# Altium PCB koosh_sensor_top_v1_1.PcbDoc
Units mil, origin at the board's own origin, x right, y up, seen from the top; angles counter-clockwise.
Board outline 600 x 600 mil, 4 copper layers (Top Layer, PWR, GND, Bottom Layer), stack 23.778 mil thick; 39 components, 28 nets, 116 pads, 36 vias.
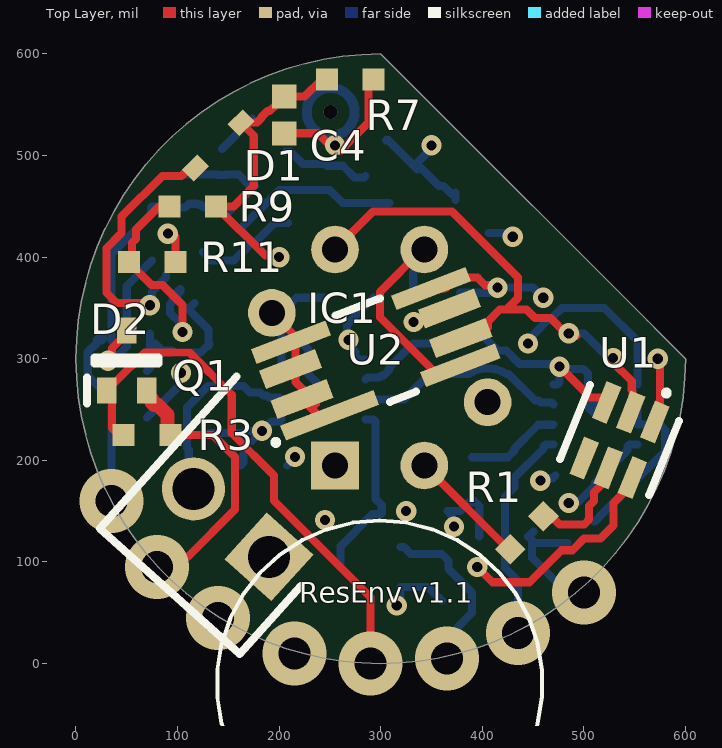
[diagram p0: Top Layer view]
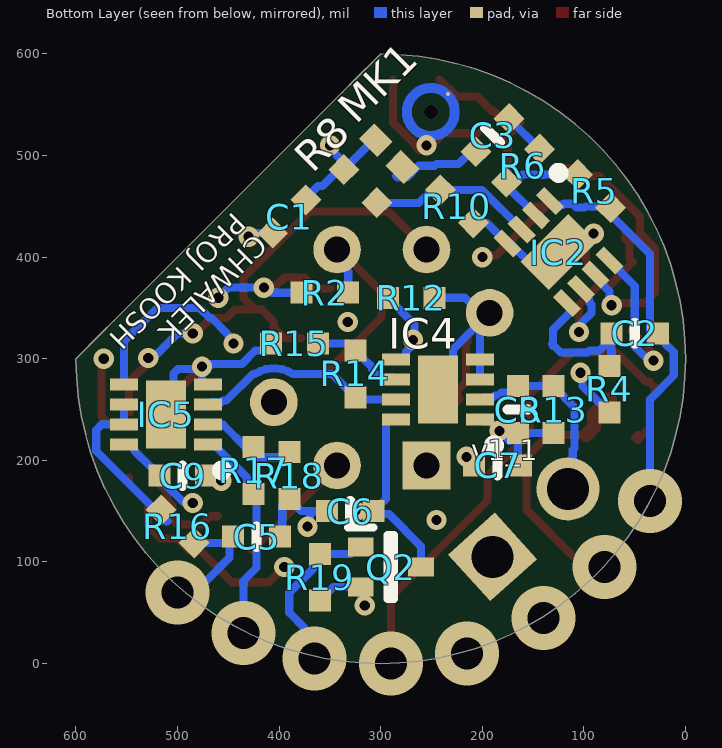
[diagram p1: Bottom Layer view, seen from below]
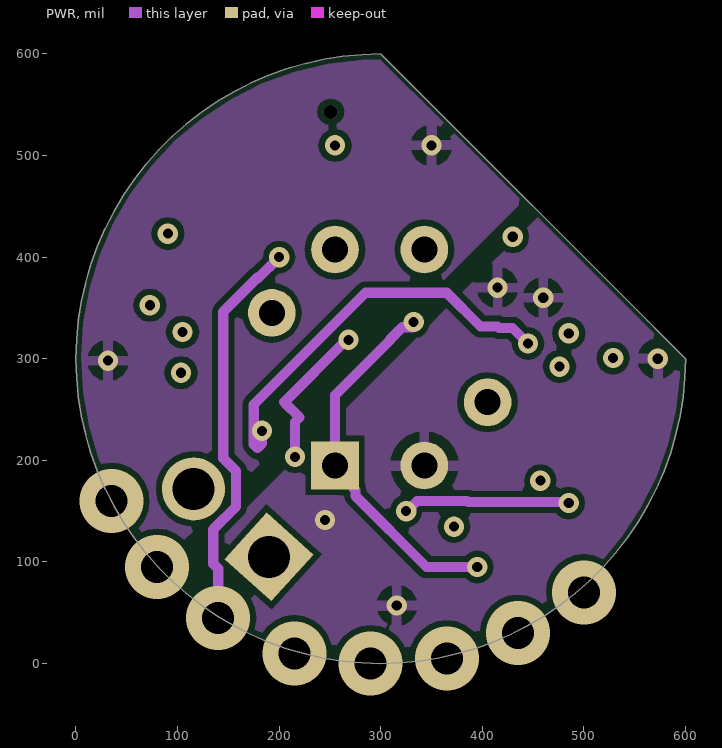
[diagram p2: PWR]
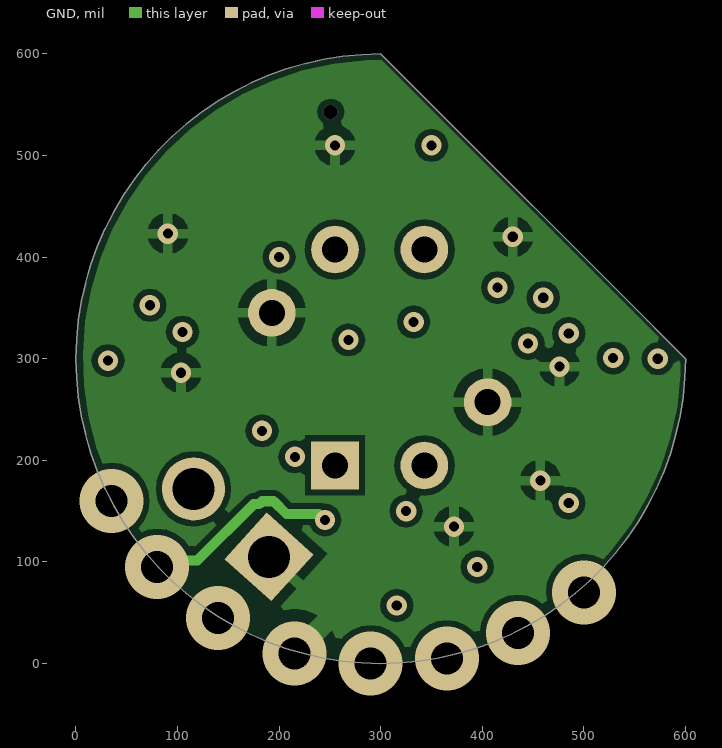
[diagram p3: GND]
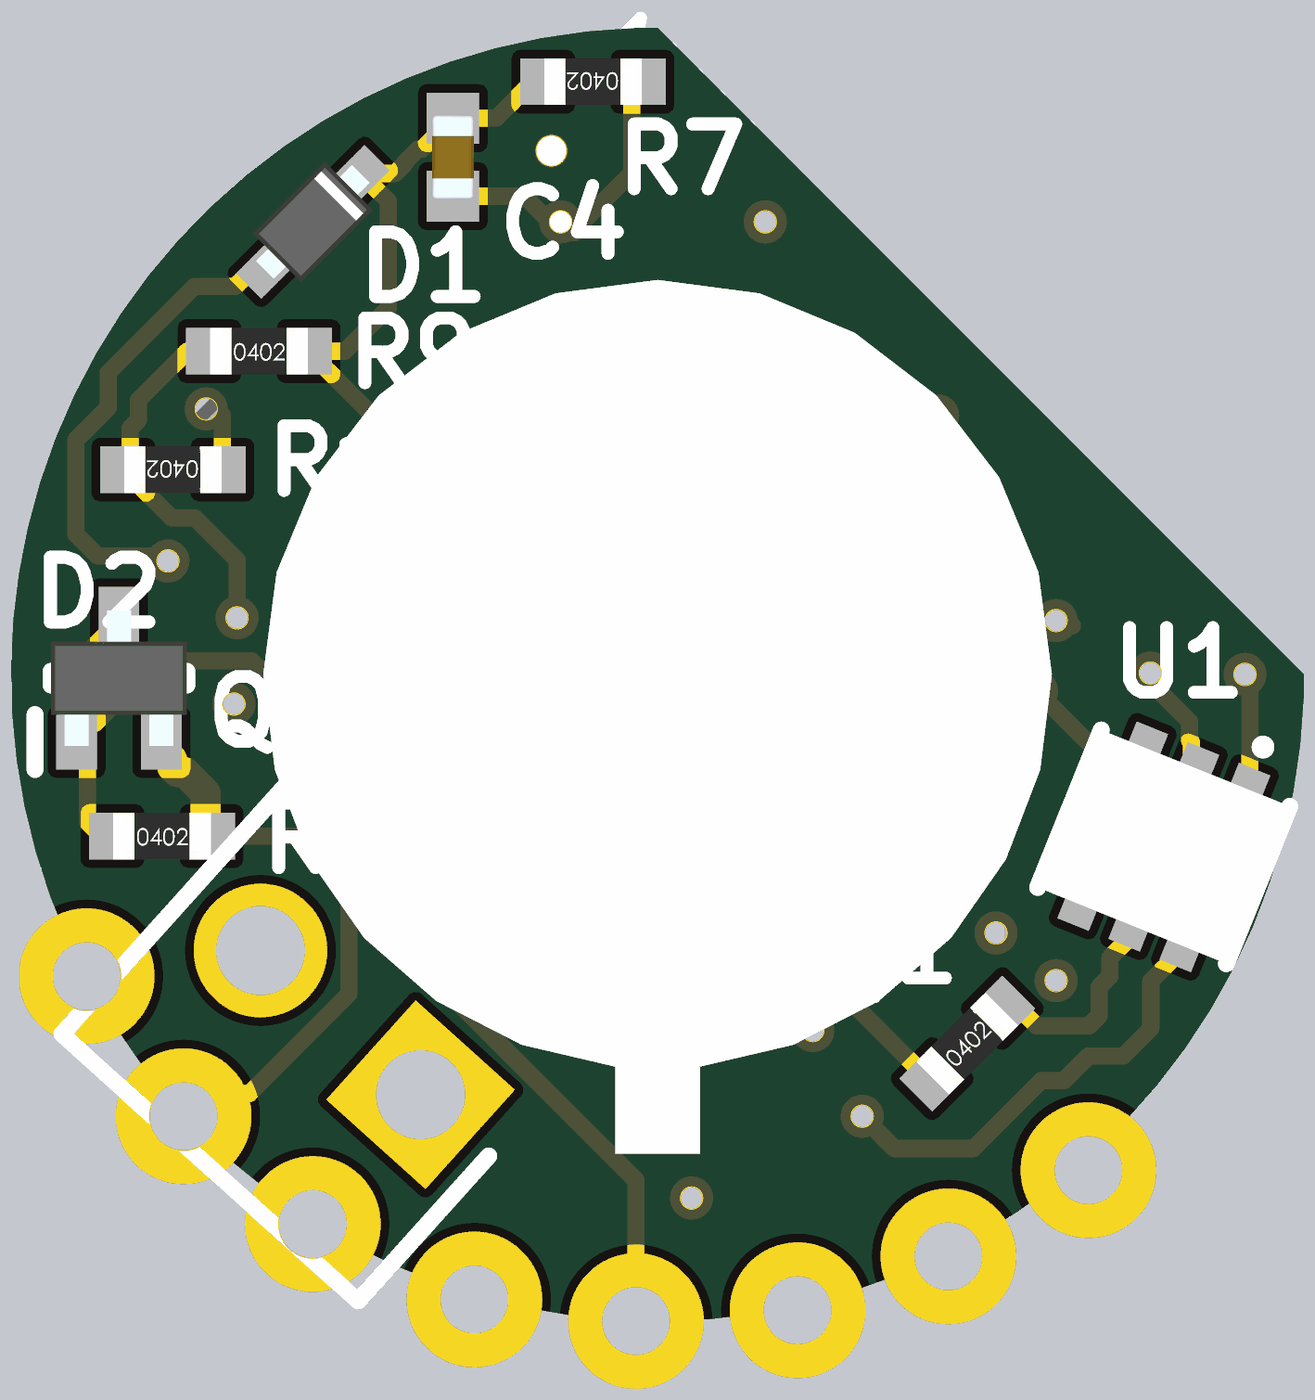
[diagram p4: 3D render of the assembled board from above, using the file's embedded part models]
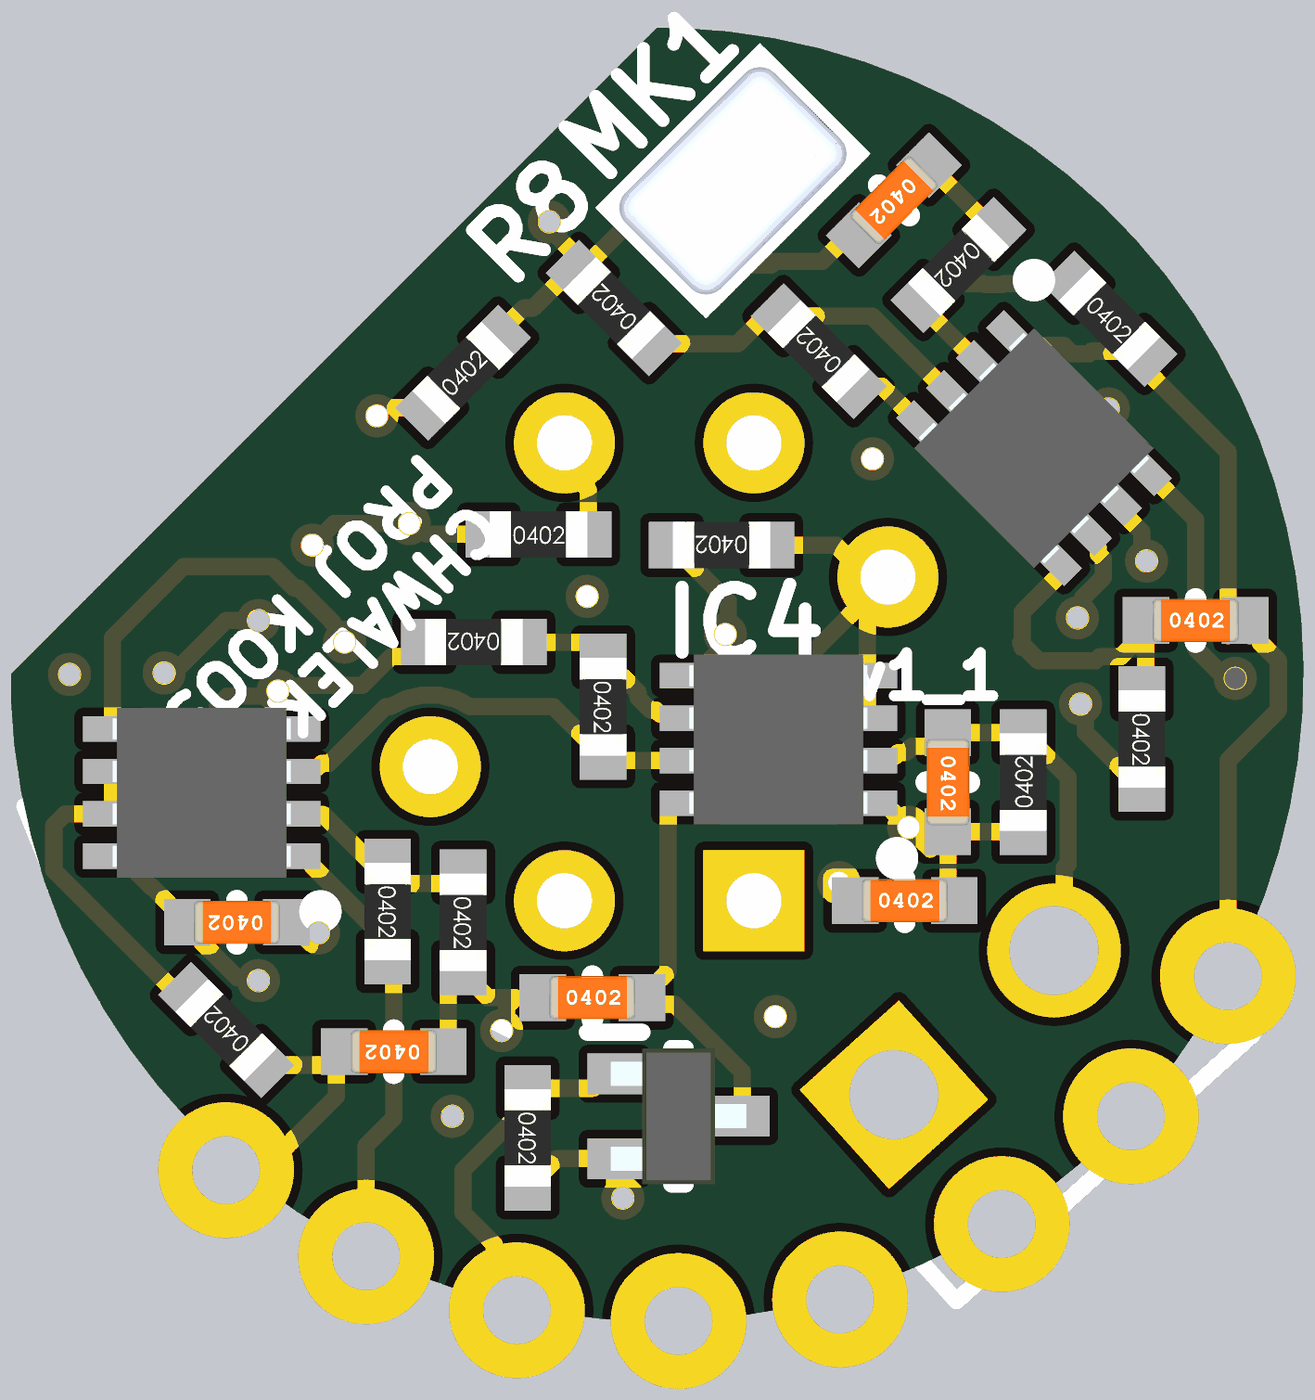
[diagram p5: 3D render of the assembled board from below, using the file's embedded part models]

## Layer stack, top to bottom
Top Solder: solder mask 0.394, Solder Resist, Dk 3.5
Top Layer: signal copper 1.417
Dielectric 2: prepreg 2.795, PP-006, Dk 4.1
PWR: signal copper 1.378
Dielectric 1: dielectric 12.598, FR-4, Dk 4.8
GND: signal copper 1.378
Dielectric 3: prepreg 2.795, PP-006, Dk 4.1
Bottom Layer: signal copper 1.417
Bottom Solder: solder mask 0.394, Solder Resist, Dk 3.5

## Board outline
600,300 cw(c300,300) 300,600 303.16,596.84 325,575 337.5,562.5 562.5,337.5 575,325

## Design rules (kind name [scope] priority, off if disabled: settings)
Clearance [All] p1: gap=6 ignorepadtopadclearanceinfootprint=FALSE except(0: Arc-Hole Track-Hole SMDPad-Hole THPad-Hole Via-Hole Fill-Hole Poly-Hole Region-Hole Text-Hole)
PlaneConnect PWR [InNet('GND') or InNet('3.3V') or InNet('VBAT')] p1: planeconnectstyle=Relief reliefexpansion=20 reliefentries=4 reliefconductorwidth=10 reliefairgap=10
PlaneConnect [All] p2: planeconnectstyle=Relief reliefexpansion=20 reliefentries=4 reliefconductorwidth=10 reliefairgap=10
PolygonConnect [All] p1: connectstyle=Relief reliefconductorwidth=10 reliefentries=4 polygonreliefangle="90 Angle" airgapwidth=10
RoutingVias [All] p1: holewidth=10 width=20 viastyle="Through Hole" minholewidth=10 minwidth=20 maxholewidth=10 maxwidth=20
SolderMaskExpansion [All] p1: expansion=4 istentingtop=FALSE
Width [All] p1: maxlimit=10 minlimit=5 preferedwidth=10 toplayer_maxwidth=8 toplayer_prefwidth=6 midlayer1_minwidth=10 midlayer2_minwidth=10 bottomlayer_maxwidth=8 bottomlayer_prefwidth=6 minimp=50.000000 maximp=50.000000 favimp=50.000000
29 further rules are at their usual default settings.

## Classes and differential pairs
component class koosh_sensor_top_lighthouse: C5 C6 C7 C8 C9 D2 IC4 IC5 Q2 R12 R13 R14 R15 R16 R17 R18 R19
component class koosh_sensor_top: C1 C2 C3 C4 D1 IC1 IC2 MK1 Q1 R1 R2 R3 R4 R5 R6 R7 R8 R9 R10 R11 U1 U2

## Components (designator, comment, footprint, x,y, rotation, side; value= is the part's Value field where it differs from the comment)
C1 "1µF" SMD-0402-RES 390,440 r225 bottom
C2 "4.7µF" SMD-0402C 50,325 r270 bottom
C3 "4.7µF" SMD-0402C 190,520 r45 bottom
C4 "10µF" CAPC1005X55N 205,540 r270 top
C5 "10000pF" SMD-0402C 422.17,124.97 r90 bottom
C6 "0.10µF" SMD-0402C 330,150 r270 bottom
C7 "10000pF" SMD-0402C 185,195 r270 bottom
C8 "5pF" SMD-0402C 165,250 r0 bottom
C9 "0.10µF" SMD-0402C 495,185 r90 bottom
D1 "1N4148X-TP" SODFL1608X70N 140,510 r225 top
D2 "BPV22NF" TO254P510X450X920-2P 190,105 r138 top locked
IC1 "TPIS_1T_1084" TPIS1T1084 255,195 r90 top locked
IC2 "TLV9062IDSGT" SON50P200X200X80-9N 125,405 r225 bottom
IC4 "TLV9062IDSGT" SON50P200X200X80-9N 243.66,269.84 r0 bottom
IC5 "TLV9062IDSGT" SON50P200X200X80-9N 511.34,245.16 r0 bottom
MK1 "SPV1840LR5H-B" *MIC_SPV1840LR5H-B 250.72,542.96 r45 bottom
Q1 "RE1C002ZPTL" SOTFL50P160X85-3N 50,298.25 r90 top
Q2 "RE1C002ZPTL" SOTFL50P160X85-3N 290,95 r180 bottom
R1 "10k" SMD-0402-RES 443.74,128.74 r315 top
R2 "10k" SMD-0402-RES 355,365 r270 bottom
R3 "1M" SMD-0402-RES 70,225 r270 top
R4 "4.7k" SMD-0402-RES 75,270 r0 bottom
R5 "100k" SMD-0402-RES 90,465 r315 bottom
R6 "4.7k" SMD-0402-RES 160,490 r45 bottom
R7 "100k" SMD-0402-RES 270,575 r90 top
R8 "100k" SMD-0402-RES 320,470 r135 bottom
R9 "100k" SMD-0402-RES 115,450 r270 top
R10 "100k" SMD-0402-RES 225,450 r135 bottom
R11 "51.1k" SMD-0402-RES 75,395 r90 top
R12 "47k" SMD-0402-RES 270,360 r90 bottom
R13 "100k" SMD-0402-RES 130,250 r180 bottom
R14 "20k" SMD-0402-RES 325,285 r0 bottom
R15 "3.3k" SMD-0402-RES 385,315 r90 bottom
R16 "47k" SMD-0402-RES 500,135 r135 bottom
R17 "20k" SMD-0402-RES 425,190 r0 bottom
R18 "3.3k" SMD-0402-RES 390,185 r0 bottom
R19 "1M" SMD-0402-RES 360,85 r0 bottom
U1 "TCS34725FN" FN_1 535,220 r248 top
U2 "TPIS_1S_1385" TPIS_1S_1385 295,305 r291 top

## Footprints (in the part's own frame and the unit in brackets; to place one, negate y for a bottom-side part, rotate by r counter-clockwise, add the part's x,y. Pads: shape width x height; smd on the part's side, far side on the other; paste and mask are expansions set on the pad)
*MIC_SPV1840LR5H-B [mm]
  rect 0.65x0.545 smd: 1(0.473,1.477) 2(-0.474,1.476)
  round 0.1 smd mask+0: 3(0.01,-0.62)
  Top Layer circle w0.25: c0,0 r0.6
  body extent -0.92,-0.87 0.93,1.88, height 0.9
CAPC1005X55N [mm]
  rect 0.6x0.62 smd: 1(-0.46,0) 2(0.46,0)
  body extent -0.5,-0.25 0.5,0.25, height 0.55
FN_1 [mm]
  rect 1x0.4 smd: 1(-0.75,0.65) 2(-0.75,0) 3(-0.75,-0.65) 4(0.75,-0.65) 5(0.75,0) 6(0.75,0.65)
  silkscreen extent -1.56,-1.2 1,1.2, body extent -1,-1.2 1,1.2, height 0.65
SMD-0402-RES [mm]
  rect 0.55x0.55 smd: 1(0,0.584) 2(0,-0.584)
  body extent -0.27,-0.57 0.28,0.58, height 0.41
SMD-0402C [mm]
  rect 0.55x0.55 smd: 1(0,0.584) 2(0,-0.584)
  silkscreen extent -0.25,0 0.25,0, body extent -0.25,-0.51 0.25,0.51, height 0.51
SODFL1608X70N [mm]
  rect 0.54x0.42 smd: 1(-0.8,0) 2(0.8,0)
  body extent -0.8,-0.4 0.8,0.4, height 0.7
SON50P200X200X80-9N [mm]
  rect 0.7x0.3 smd: 1(-1.05,0.75) 2(-1.05,0.25) 3(-1.05,-0.25) 4(-1.05,-0.75) 5(1.05,-0.75) 6(1.05,-0.25) 7(1.05,0.25) 8(1.05,0.75)
  rect 1x1.7 smd: 9(0,0)
  silkscreen extent -1.52,1.28 -1.28,1.52, body extent -1.05,-1 1.05,1, height 0.8
SOTFL50P160X85-3N [mm]
  rect 0.645x0.48 smd: 1(-0.752,0.5) 2(-0.752,-0.5) 3(0.752,0)
  silkscreen extent -1.07,-0.8 0.08,0.99, body extent -0.8,-0.8 0.8,0.8, height 0.85
TO254P510X450X920-2P [mm]
  rect 1.575x1.575 hole 1.05: 1(0,0)
  round 1.575 hole 1.05: 2(2.54,0)
  silkscreen extent -1.08,-2.8 3.62,2.3
TPIS1T1084 [mm]
  rect 1.192x1.192 hole 0.65: 1(0,0)
  round 1.192 hole 0.65: 2(0,-2.234) 3(1.58,-3.815) 4(5.396,-2.234) 5(5.396,0) 6(3.815,1.58)
  silkscreen extent -9.53,-5.18 -1.38,2.94, body extent -2.98,-5.79 7.32,3.51, height 8.41
TPIS_1S_1385 [mm]
  rect 0.4x2.5 smd: 1(1.025,-1.625)
  rect 0.5x1.5 smd: 2(0.4,-2.125) 3(-0.4,-2.125) 6(-0.4,2.125) 7(0.4,2.125)
  rect 0.4x2 smd: 4(-1.025,-1.875) 5(-1.025,1.875) 8(1.025,1.875)
  silkscreen extent -1.25,-3.16 1.25,0.6

## Part data
C1: library part GCM155C71A105KE38D, "CAP CER 1UF 10V X7S 0402", Digi-Key Part Number=490-13409-1-ND, Manufacturer="Murata Electronics North America", Operating Temperature="-55°C ~ 125°C", Package / Case="0402 (1005 Metric)", Ratings=AEC-Q200, Temperature Coefficient=X7S, Tolerance=±10%, Voltage=10V, @ qty=0, Applications=Automotive, Datasheets=http://www.murata.com/~/media/webrenewal/support/library/catalog/products/capacitor/mlcc/c03e.ashx, Factory Stock=0, Features=-, Height - Seated (Max)=-, Image=//media.digikey.com/Renders/Murata%20Renders/ZRB-SERIES-0402.jpg, Lead Spacing=-, Lead Style=-, Minimum Quantity=1, Mounting Type="Surface Mount, MLCC", Packaging="Cut Tape (CT)", Part Number=GCM155C71A105KE38D, Part Status=Active, Quantity Available=7240, Series=GCM, Size / Dimension="0.039\" L x 0.020\" W (1.00mm x 0.50mm)", Thickness (Max)="0.022\" (0.55mm)", Unit Price (USD)=0.12
C2 C3: library part GRM155R60J475ME47D, "CAP CER 4.7UF 6.3V X5R 0402", Digi-Key Part Number=490-5915-1-ND, Manufacturer="Murata Electronics North America", Operating Temperature="-55°C ~ 85°C", Package / Case="0402 (1005 Metric)", Ratings=-, Temperature Coefficient=X5R, Tolerance=±20%, Voltage=6.3V, @ qty=0, Applications="General Purpose", Datasheets=http://www.murata.com/~/media/webrenewal/support/library/catalog/products/capacitor/mlcc/c02e.pdf, Factory Stock=0, Features="Derating Recommended", Height - Seated (Max)=-, Image=//media.digikey.com/Renders/Murata%20Renders/ZRB-SERIES-0402.jpg, Lead Spacing=-, Lead Style=-, Minimum Quantity=1, Mounting Type="Surface Mount, MLCC", Packaging="Cut Tape (CT)", Part Number=GRM155R60J475ME47D, Part Status=Active, Quantity Available=1963747, Series=GRM, Size / Dimension="0.039\" L x 0.020\" W (1.00mm x 0.50mm)", Thickness (Max)="0.024\" (0.60mm)", Unit Price (USD)=0.14
C4: library part GCM155R71C104KA55D, "CAP CER 10UF 16V X7R 0402", Digi-Key Part Number=490-4759-1-ND, Manufacturer="Murata Electronics North America", Operating Temperature="-55°C ~ 125°C", Package / Case="0402 (1005 Metric)", Ratings=AEC-Q200, Temperature Coefficient=X7R, Tolerance=±10%, Voltage=16V, @ qty=0, Applications=Automotive, Datasheets=http://www.murata.com/~/media/webrenewal/support/library/catalog/products/capacitor/mlcc/c03e.ashx, Factory Stock=0, Features=-, Height - Seated (Max)=-, Image=//media.digikey.com/Renders/Murata%20Renders/ZRB-SERIES-0402.jpg, Lead Spacing=-, Lead Style=-, Minimum Quantity=1, Mounting Type="Surface Mount, MLCC", Packaging="Cut Tape (CT)", Part Number=GCM155R71C104KA55D, Part Status=Active, Quantity Available=734194, Series=GCM, Size / Dimension="0.039\" L x 0.020\" W (1.00mm x 0.50mm)", Thickness (Max)="0.022\" (0.55mm)", Unit Price (USD)=0.1
C5 C7: library part GCM155R71H103KA55D, "CAP CER 10000PF 50V X7R 0402", Digi-Key Part Number=490-4762-1-ND, Manufacturer="Murata Electronics North America", Operating Temperature="-55°C ~ 125°C", Package / Case="0402 (1005 Metric)", Ratings=AEC-Q200, Temperature Coefficient=X7R, Tolerance=±10%, Voltage=50V, @ qty=0, Applications=Automotive, Datasheets=http://www.murata.com/~/media/webrenewal/support/library/catalog/products/capacitor/mlcc/c03e.ashx, Factory Stock=0, Features=-, Height - Seated (Max)=-, Image=//media.digikey.com/Renders/Murata%20Renders/ZRB-SERIES-0402.jpg, Lead Spacing=-, Lead Style=-, Minimum Quantity=1, Mounting Type="Surface Mount, MLCC", Packaging="Cut Tape (CT)", Part Number=GCM155R71H103KA55D, Part Status=Active, Quantity Available=650067, Series=GCM, Size / Dimension="0.039\" L x 0.020\" W (1.00mm x 0.50mm)", Thickness (Max)="0.022\" (0.55mm)", Unit Price (USD)=0.1
C6 C9: library part GCM155R71C104KA55D, "CAP CER 0.1UF 16V X7R 0402", Digi-Key Part Number=490-4759-1-ND, Manufacturer="Murata Electronics North America", Operating Temperature="-55°C ~ 125°C", Package / Case="0402 (1005 Metric)", Ratings=AEC-Q200, Temperature Coefficient=X7R, Tolerance=±10%, Voltage=16V, @ qty=0, Applications=Automotive, Datasheets=http://www.murata.com/~/media/webrenewal/support/library/catalog/products/capacitor/mlcc/c03e.ashx, Factory Stock=0, Features=-, Height - Seated (Max)=-, Image=//media.digikey.com/Renders/Murata%20Renders/ZRB-SERIES-0402.jpg, Lead Spacing=-, Lead Style=-, Minimum Quantity=1, Mounting Type="Surface Mount, MLCC", Packaging="Cut Tape (CT)", Part Number=GCM155R71C104KA55D, Part Status=Active, Quantity Available=734194, Series=GCM, Size / Dimension="0.039\" L x 0.020\" W (1.00mm x 0.50mm)", Thickness (Max)="0.022\" (0.55mm)", Unit Price (USD)=0.1
C8: library part GJM1555C1H5R0BB01D, "CAP CER 5PF 50V NP0 0402", Digi-Key Part Number=490-8103-1-ND, Manufacturer="Murata Electronics North America", Operating Temperature="-55°C ~ 125°C", Package / Case="0402 (1005 Metric)", Ratings=-, Temperature Coefficient="C0G, NP0", Tolerance=±0.1pF, Voltage=50V, @ qty=0, Applications="RF, Microwave, High Frequency", Datasheets=http://www.murata.com/~/media/webrenewal/support/library/catalog/products/capacitor/mlcc/c02e.pdf, Factory Stock=0, Features="High Q, Low Loss", Height - Seated (Max)=-, Image=//media.digikey.com/Renders/Murata%20Renders/ZRB-SERIES-0402.jpg, Lead Spacing=-, Lead Style=-, Minimum Quantity=1, Mounting Type="Surface Mount, MLCC", Packaging="Cut Tape (CT)", Part Number=GJM1555C1H5R0BB01D, Part Status=Active, Quantity Available=17055, Series=GJM, Size / Dimension="0.039\" L x 0.020\" W (1.00mm x 0.50mm)", Thickness (Max)="0.022\" (0.55mm)", Unit Price (USD)=0.2
D1: "Diode", Manufacturer_Name="Micro Commercial Components (MCC)", Mouser Part Number=833-1N4148X-TP, Datasheet Link=http://www.mouser.com/ds/2/258/1N4148X(SOD-523)-349105.pdf, Height=0.7mm, Manufacturer_Part_Number=1N4148X-TP, Mouser Price/Stock=https://www.mouser.com/Search/Refine.aspx?Keyword=833-1N4148X-TP
D2: "Diode", Manufacturer_Name=Vishay, Mouser Part Number=782-BPV22NF, RS Part Number=6997604P, Allied Price/Stock=https://www.alliedelec.com/vishay-dale-bpv22nf/R1086877/, Allied_Number=R1086877, Datasheet Link=http://www.vishay.com/docs/81509/bpv22nf.pdf, Height=5.1mm, Manufacturer_Part_Number=BPV22NF, Mouser Price/Stock=https://www.mouser.com/Search/Refine.aspx?Keyword=782-BPV22NF, RS Price/Stock=http://uk.rs-online.com/web/p/products/6997604P
IC1: "Integrated Circuit", Manufacturer_Name="Excelitas Technologies", Manufacturer_Part_Number="TPIS 1T 1084", Datasheet Link=http://www.excelitas.com/Downloads/IR_Innovations_Brochure.pdf, Height=4.5mm
IC2 IC4 IC5: "Integrated Circuit", Manufacturer_Name="Texas Instruments", Mouser Part Number=595-TLV9062IDSGT, Datasheet Link=http://www.ti.com/lit/gpn/TLV9062, Height=0.8mm, Manufacturer_Part_Number=TLV9062IDSGT, Mouser Price/Stock=https://www.mouser.com/Search/Refine.aspx?Keyword=595-TLV9062IDSGT
MK1: "Mic Mems Analog", Package="0805 Knowles", Availability=Unavailable, MF=Knowles, MP=SPV1840LR5H-B, Price=None, SnapEDA_Link=https://www.snapeda.com/parts/SPV1840LR5H-B/Knowles/view-part/?ref=snap
Q1 Q2: "MOSFET (P-Channel)", Manufacturer_Name="ROHM Semiconductor", Mouser Part Number=755-RE1C002ZPTL, RS Part Number=1486960P, Datasheet Link=https://componentsearchengine.com/Datasheets/1/RE1C002ZPTL.pdf, Height=0.85mm, Manufacturer_Part_Number=RE1C002ZPTL, Mouser Price/Stock=https://www.mouser.com/Search/Refine.aspx?Keyword=755-RE1C002ZPTL, RS Price/Stock=http://uk.rs-online.com/web/p/products/1486960P
R1 R2: library part ERJ-2GEJ103X, "RES SMD 10K OHM 5% 1/10W 0402", Digi-Key Part Number=P10KJCT-ND, Manufacturer="Panasonic Electronic Components", Operating Temperature="-55°C ~ 155°C", Package / Case="0402 (1005 Metric)", Power (Watts)="0.1W, 1/10W", Supplier Device Package=0402, Temperature Coefficient=±200ppm/°C, Tolerance=±5%, @ qty=1500, Composition="Thick Film", Datasheets=http://industrial.panasonic.com/www-cgi/jvcr13pz.cgi?E+PZ+3+AOA0001+ERJ2GEJ103X+7+WW, Factory Stock=0, Failure Rate=-, Features="Automotive AEC-Q200", Height - Seated (Max)="0.016\" (0.40mm)", Image=//media.digikey.com/Photos/Panasonic%20Photos/ERJ-PA2-Series.jpg, Minimum Quantity=1, Number of Terminations=2, Packaging="Cut Tape (CT)", Part Number=ERJ-2GEJ103X, Part Status=Active, Quantity Available=2560215, Series=ERJ, Size / Dimension="0.039\" L x 0.020\" W (1.00mm x 0.50mm)", Unit Price (USD)=0.00350
R3 R19: library part ERJ-2GEJ105X, "RES SMD 1M OHM 5% 1/10W 0402", Digi-Key Part Number=P1.0MJCT-ND, Manufacturer="Panasonic Electronic Components", Operating Temperature="-55°C ~ 155°C", Package / Case="0402 (1005 Metric)", Power (Watts)="0.1W, 1/10W", Supplier Device Package=0402, Temperature Coefficient=±200ppm/°C, Tolerance=±5%, @ qty=1500, Composition="Thick Film", Datasheets=http://industrial.panasonic.com/www-cgi/jvcr13pz.cgi?E+PZ+3+AOA0001+ERJ2GEJ105X+7+WW, Factory Stock=0, Failure Rate=-, Features="Automotive AEC-Q200", Height - Seated (Max)="0.016\" (0.40mm)", Image=//media.digikey.com/Photos/Panasonic%20Photos/ERJ-PA2-Series.jpg, Minimum Quantity=1, Number of Terminations=2, Packaging="Cut Tape (CT)", Part Number=ERJ-2GEJ105X, Part Status=Active, Quantity Available=1082572, Series=ERJ, Size / Dimension="0.039\" L x 0.020\" W (1.00mm x 0.50mm)", Unit Price (USD)=0.00350
R4 R6: library part ERJ-2GEJ103X, "RES SMD 4.7K OHM 5% 1/10W 0402", Digi-Key Part Number=P10KJCT-ND, Manufacturer="Panasonic Electronic Components", Operating Temperature="-55°C ~ 155°C", Package / Case="0402 (1005 Metric)", Power (Watts)="0.1W, 1/10W", Supplier Device Package=0402, Temperature Coefficient=±200ppm/°C, Tolerance=±5%, @ qty=1500, Composition="Thick Film", Datasheets=http://industrial.panasonic.com/www-cgi/jvcr13pz.cgi?E+PZ+3+AOA0001+ERJ2GEJ103X+7+WW, Factory Stock=0, Failure Rate=-, Features="Automotive AEC-Q200", Height - Seated (Max)="0.016\" (0.40mm)", Image=//media.digikey.com/Photos/Panasonic%20Photos/ERJ-PA2-Series.jpg, Minimum Quantity=1, Number of Terminations=2, Packaging="Cut Tape (CT)", Part Number=ERJ-2GEJ103X, Part Status=Active, Quantity Available=2560215, Series=ERJ, Size / Dimension="0.039\" L x 0.020\" W (1.00mm x 0.50mm)", Unit Price (USD)=0.00350
R5 R7 R8 R9 R10: library part ERJ-2GEJ103X, "RES SMD 100K OHM 5% 1/10W 0402", Digi-Key Part Number=P10KJCT-ND, Manufacturer="Panasonic Electronic Components", Operating Temperature="-55°C ~ 155°C", Package / Case="0402 (1005 Metric)", Power (Watts)="0.1W, 1/10W", Supplier Device Package=0402, Temperature Coefficient=±200ppm/°C, Tolerance=±5%, @ qty=1500, Composition="Thick Film", Datasheets=http://industrial.panasonic.com/www-cgi/jvcr13pz.cgi?E+PZ+3+AOA0001+ERJ2GEJ103X+7+WW, Factory Stock=0, Failure Rate=-, Features="Automotive AEC-Q200", Height - Seated (Max)="0.016\" (0.40mm)", Image=//media.digikey.com/Photos/Panasonic%20Photos/ERJ-PA2-Series.jpg, Minimum Quantity=1, Number of Terminations=2, Packaging="Cut Tape (CT)", Part Number=ERJ-2GEJ103X, Part Status=Active, Quantity Available=2560215, Series=ERJ, Size / Dimension="0.039\" L x 0.020\" W (1.00mm x 0.50mm)", Unit Price (USD)=0.00350
R11: library part ERJ-2GEJ103X, "RES SMD 51.1K OHM 5% 1/10W 0402", Digi-Key Part Number=P10KJCT-ND, Manufacturer="Panasonic Electronic Components", Operating Temperature="-55°C ~ 155°C", Package / Case="0402 (1005 Metric)", Power (Watts)="0.1W, 1/10W", Supplier Device Package=0402, Temperature Coefficient=±200ppm/°C, Tolerance=±5%, @ qty=1500, Composition="Thick Film", Datasheets=http://industrial.panasonic.com/www-cgi/jvcr13pz.cgi?E+PZ+3+AOA0001+ERJ2GEJ103X+7+WW, Factory Stock=0, Failure Rate=-, Features="Automotive AEC-Q200", Height - Seated (Max)="0.016\" (0.40mm)", Image=//media.digikey.com/Photos/Panasonic%20Photos/ERJ-PA2-Series.jpg, Minimum Quantity=1, Number of Terminations=2, Packaging="Cut Tape (CT)", Part Number=ERJ-2GEJ103X, Part Status=Active, Quantity Available=2560215, Series=ERJ, Size / Dimension="0.039\" L x 0.020\" W (1.00mm x 0.50mm)", Unit Price (USD)=0.00350
R12 R16: library part ERJ-2GEJ473X, "RES SMD 47K OHM 5% 1/10W 0402", Digi-Key Part Number=P47KJCT-ND, Manufacturer="Panasonic Electronic Components", Operating Temperature="-55°C ~ 155°C", Package / Case="0402 (1005 Metric)", Power (Watts)="0.1W, 1/10W", Supplier Device Package=0402, Temperature Coefficient=±200ppm/°C, Tolerance=±5%, @ qty=1500, Composition="Thick Film", Datasheets=http://industrial.panasonic.com/www-cgi/jvcr13pz.cgi?E+PZ+3+AOA0001+ERJ2GEJ473X+7+WW, Factory Stock=0, Failure Rate=-, Features="Automotive AEC-Q200", Height - Seated (Max)="0.016\" (0.40mm)", Image=//media.digikey.com/Photos/Panasonic%20Photos/ERJ-PA2-Series.jpg, Minimum Quantity=1, Number of Terminations=2, Packaging="Cut Tape (CT)", Part Number=ERJ-2GEJ473X, Part Status=Active, Quantity Available=5182645, Series=ERJ, Size / Dimension="0.039\" L x 0.020\" W (1.00mm x 0.50mm)", Unit Price (USD)=0.00350
R13: library part ERJ-2GEJ104X, "RES SMD 100K OHM 5% 1/10W 0402", Digi-Key Part Number=P100KJCT-ND, Manufacturer="Panasonic Electronic Components", Operating Temperature="-55°C ~ 155°C", Package / Case="0402 (1005 Metric)", Power (Watts)="0.1W, 1/10W", Supplier Device Package=0402, Temperature Coefficient=±200ppm/°C, Tolerance=±5%, @ qty=1500, Composition="Thick Film", Datasheets=http://industrial.panasonic.com/www-cgi/jvcr13pz.cgi?E+PZ+3+AOA0001+ERJ2GEJ104X+7+WW, Factory Stock=0, Failure Rate=-, Features="Automotive AEC-Q200", Height - Seated (Max)="0.016\" (0.40mm)", Image=//media.digikey.com/Photos/Panasonic%20Photos/ERJ-PA2-Series.jpg, Minimum Quantity=1, Number of Terminations=2, Packaging="Cut Tape (CT)", Part Number=ERJ-2GEJ104X, Part Status=Active, Quantity Available=2387986, Series=ERJ, Size / Dimension="0.039\" L x 0.020\" W (1.00mm x 0.50mm)", Unit Price (USD)=0.00350
R14 R17: library part ERJ-2GEJ473X, "RES SMD 20K OHM 5% 1/10W 0402", Digi-Key Part Number=P47KJCT-ND, Manufacturer="Panasonic Electronic Components", Operating Temperature="-55°C ~ 155°C", Package / Case="0402 (1005 Metric)", Power (Watts)="0.1W, 1/10W", Supplier Device Package=0402, Temperature Coefficient=±200ppm/°C, Tolerance=±5%, @ qty=1500, Composition="Thick Film", Datasheets=http://industrial.panasonic.com/www-cgi/jvcr13pz.cgi?E+PZ+3+AOA0001+ERJ2GEJ473X+7+WW, Factory Stock=0, Failure Rate=-, Features="Automotive AEC-Q200", Height - Seated (Max)="0.016\" (0.40mm)", Image=//media.digikey.com/Photos/Panasonic%20Photos/ERJ-PA2-Series.jpg, Minimum Quantity=1, Number of Terminations=2, Packaging="Cut Tape (CT)", Part Number=ERJ-2GEJ473X, Part Status=Active, Quantity Available=5182645, Series=ERJ, Size / Dimension="0.039\" L x 0.020\" W (1.00mm x 0.50mm)", Unit Price (USD)=0.00350
R15 R18: library part ERJ-2GEJ332X, "RES SMD 3.3K OHM 5% 1/10W 0402", Digi-Key Part Number=P3.3KJCT-ND, Manufacturer="Panasonic Electronic Components", Operating Temperature="-55°C ~ 155°C", Package / Case="0402 (1005 Metric)", Power (Watts)="0.1W, 1/10W", Supplier Device Package=0402, Temperature Coefficient=±200ppm/°C, Tolerance=±5%, @ qty=1500, Composition="Thick Film", Datasheets=http://industrial.panasonic.com/www-cgi/jvcr13pz.cgi?E+PZ+3+AOA0001+ERJ2GEJ332X+7+WW, Factory Stock=0, Failure Rate=-, Features="Automotive AEC-Q200", Height - Seated (Max)="0.016\" (0.40mm)", Image=//media.digikey.com/Photos/Panasonic%20Photos/ERJ-PA2-Series.jpg, Minimum Quantity=1, Number of Terminations=2, Packaging="Cut Tape (CT)", Part Number=ERJ-2GEJ332X, Part Status=Active, Quantity Available=514266, Series=ERJ, Size / Dimension="0.039\" L x 0.020\" W (1.00mm x 0.50mm)", Unit Price (USD)=0.00350
U1: "Undefined or Miscellaneous", Manufacturer_Name=ams, Mouser Part Number=985-TCS34725FN, RS Part Number=1024173P, Datasheet Link=https://ams.com/jpn/content/download/319364/1117183/file/TCS3472_Datasheet_EN_v2.pdf, Manufacturer_Part_Number=TCS34725FN, Mouser Price/Stock=https://www.mouser.com/Search/Refine.aspx?Keyword=985-TCS34725FN, RS Price/Stock=http://china.rs-online.com/web/p/products/1024173P
U2: "Undefined or Miscellaneous", Manufacturer_Name="Excelitas Technologies", Manufacturer_Part_Number="TPIS 1S 1385", Datasheet Link=http://media.digikey.com/pdf/Data%20Sheets/Excelitas%20PDFs/TPiS_1S_1385.pdf

## Via types
v1: diameter 20, hole 10, Top Layer to Bottom Layer, tented both sides, 27 vias
v2: diameter 62.99, hole 31.5, Top Layer to Bottom Layer, 8 vias
v3: diameter 13.78, hole 13.78, Top Layer to Bottom Layer, 1 vias

## Nets (pads, with @x,y where several pads share a name; then routed paths per layer and width w, separated by ;. In a path a pad name is that pad's centre, name@x,y a point inside that pad or via, vN(x,y) a via of type N, cw(c..) or ccw(c..) an arc to the next point about the centre after c; other vN are vias at no path point)
3.3V: IC1.2 Q1.2 Q2.2 R1.2 R2.2 R3.1 R19.1 U1.1 U2.5 | length 883
  Top Layer w8: v2(80,95) 90.52,105.52 110.52,105.52 156.69,151.69 156.69,203.31 135,225 98,225 R3.1 ; IC1.2 425.48,112.47 R1.2 ; U2.5 362.75,369.13 364.99,369.99 375,380 395.1,380 397.44,377.66 402.8,372.3 412.7,372.3 v1(415,370) ; U1.1 575,243 575,289.31 ; v1(572.68,300) 574.97,297.7 574.97,289.34
  Top Layer w14: Q1.2@74.69,260.39 74.69,257.15 77.13,254.7 80.38,254.7 90.18,244.9 90.18,232.82 R3.1@98,225
  GND w10: v2(80,95) 86.42,101.42 119.34,101.42 174.85,156.93 180.29,156.93 183.15,159.79 194.58,159.79 207.19,147.17 239.14,147.17 v1(245.07,141.24)
  Bottom Layer w8: v1(315.81,57.07) 319.61,60.87 Q2.2 346.69,75.31 R19.1 ; R2.2 406.75,365 411.75,370 v1(415,370) 449.94,370 459.94,360 v1(460,360)
3.3V_LH: C6.1 C9.1 IC4.8 IC5.8 Q2.3 | length 439.3
  PWR w10: v1(325,150) 325.86,150 335.86,160 385,160 385.96,159.04 484.87,159.04 485,158.91 v1(485,157.94)
  Bottom Layer w8: Q2.3 260.39,115.39 292.02,147.02 300.17,147.02 301,147.85 301,156 295,162 295,230.31 294.78,230.54 294.78,238.41 292.87,240.31 IC4.8 ; v1(485,157.94) 486.3,159.24 494.79,159.24 511.17,175.63 511.17,178.17 C9.1 534.69,201.69 535.17,201.69 541.02,207.55 541.02,208.02 542.9,209.9 542.9,213.72 544.8,215.63 IC5.8
3.3V_MIC: C1.1 IC2.8 MK1.1 Q1.3 R8.1 | length 284.5
  Top Layer w8: v1(31.56,298.17) 35.64,302.25 35.64,310.35 44.46,319.16 44.55,319.16 53.15,327.76 Q1.3@53.15,327.85
  Bottom Layer w8: v1(31.56,298.17) 35.97,298.17 50,312.2 50,371.76 IC2.8 ; MK1.1 307.53,515 R8.1 336.26,493.02 350,506.75 v1(350,510) ; R8.1@338.75,488.75 357.49,470 361.82,470 369.82,462 372,462 373.74,463.74 C1.1
GND: C1.2 C4.2 C5.2 C6.2 C9.2 D2.1 IC1.3 IC1.6 IC2.4 IC2.9 IC4.3 IC4.4 IC4.9 IC5.4 IC5.9 MK1.3 R4.1 R7.2 R10.2 R11.2 R12.2 R15.1 R18.1 U1.3 U2.1 U2.2 U2.3 U2.4 | length 1103.8
  Top Layer w8: v1@90,428.12 v1@90.48,427.64 ; v1(90.48,423.17) v1@90.48,427.64 ; R11.2 98,420.12 v1@90.48,427.64 ; IC1.6 214.86,323.13 214.86,315.81 216.25,314.42 216.25,277.22 224.53,268.95 U2.2@224.53,258.33 ; C4.2 238.11,521.89 255.07,504.93 261.68,504.93 264.93,508.18 264.93,509.52 288,532.59 R7.2@288,575 ; U2.2 U2.2@224.53,258.33 ; U2.2@235.99,255.32 U2.2@227.54,255.32 ; U2.1@240.55,240.87 240.55,242.31 U2.2@227.54,255.32 ; IC1.3 IC1.3@406.36,258.37 ; v1(475.94,292.26) 506.44,261.76 517.54,261.76 U1.3 ; U2.2@224.53,258.33 U2.2@227.54,255.32
  Bottom Layer w8: R4.1@70,242 101.25,273.25 101.25,284.13 v1(103.36,286.25) ; IC2.9 133.18,396.82 155.36,396.82 163.27,404.74 163.8,404.74 172.42,413.35 IC2.4 195.49,433.74 R10.2 ; IC4.3 IC4.4 202.32,325.14 192.8,334.66 IC1.6 ; IC4.9 228.85,284.66 228.85,309.15 IC1.6 ; R12.2 216.95,360 202.14,345.2 IC1.6 ; v1(372.08,134.78) 369.79,137.07 369.79,145.96 365.74,150 378.49,150 383.17,154.69 383.17,155.17 386.5,158.5 R18.1@390,158.5 ; R18.1 397,155 C5.2@397,124.97 ; R15.1@401.17,321.83 R15.1 414.83,308.17 423.54,308.17 436.72,295 465.25,295 465.7,294.55 473.64,294.55 v1(475.94,292.26) ; C1.2 426.26,423.74 v1(430,420) ; v1(457.1,180.04) 459.4,182.33 469.33,182.33 C9.2 ; IC5.4 474.03,274.69 475.94,276.59 v1(475.94,292.26) ; v1(475.94,292.26) 478.2,290 499.38,290 504.06,285.31 IC5.9@504.06,263.99 ; IC5.9@504.06,263.99 504.06,252.43 IC5.9 511.34,256.72 IC5.9@504.06,263.99
  other v1: 255,510
  other v2: 215,10
"HIGH-PASS OUT": C5.1 R16.2 | length 130.7
  Bottom Layer w8: C5.1@450.19,129.98 C5.1 C5.1@448.81,121.33 ; R16.2 451.41,118.74 C5.1@448.81,121.33 ; v2(500,70) 489.48,80.52 472.48,80.52 448.81,104.19 C5.1@448.81,121.33
I2C1_SCL: IC1.5 U1.2 U2.7 | length 521.3
  Top Layer w8: IC1.5 292.56,445 370,445 380,435 435,380 435,359.92 423.49,348.41 ; U2.7 394.78,320.28 405.42,330.91 405.42,336.69 417.13,348.41 443.31,348.41 451.72,340 467.08,340 482.08,325 490.14,325 492.57,322.57 v1@485,322.57 ; v1(528.76,300.66) 528.76,296.24 547.01,277.99 547.01,269.27 547.79,268.48 547.79,248.16 U1.2@547.01,247.38
  Bottom Layer w8: v1(485,325) 500,325 524.34,300.66 v1(528.76,300.66)
I2C1_SDA: IC1.1 U1.6 U2.6 | length 587.5
  Top Layer w8: v1(395,95) 410,80 446.59,80 478.08,111.5 488.63,111.5 500.08,122.94 516.11,122.94 529,135.83 529,157.84 547.67,176.51 U1.6
  PWR w10: v1(332.4,336.21) 333.79,336.21 335,335 331,331 321.3,331 309,318.7 309,318.02 255,264.02 IC1.1 273.46,176.54 273.46,172.21 275,170.68 275,165 345,95 v1(395,95)
LH_DIODE_ARRAY: C8.2 D2.2 IC4.2 R13.1 | length 190.1
  Bottom Layer w8: D2.2 110.97,176.63 110.97,210.23 109.17,212.03 109.17,252.17 R13.1 C8.2 171.22,266.78 181.4,266.78 184.4,263.78 187.86,263.78 189.73,261.91 200.42,261.91 IC4.2
LH_EN: Q2.1 R19.2 | length 168.9
  Bottom Layer w8: Q2.1 322.85,114.69 329.54,108 R19.2 366.83,101.17 366.83,93.17 390,70 390,50 375.52,35.52 375.52,15.52 v2(365,5)
LH_INV_AMP_N: IC4.6 R14.2 R15.2 | length 93.1
  Bottom Layer w8: IC4.6 286.91,281.59 298.59,281.59 300.46,283.46 302.92,283.46 308.78,289.32 308.78,291.78 318.17,301.17 R14.2 332,315 R15.2
LH_SIG: IC5.1 R17.1 | length 215.4
  Bottom Layer w8: v2(435,30) 435,81.51 422.17,94.33 422.17,164.17 431.7,173.7 431.7,182.92 460.22,211.44 460.22,213.72 462.13,215.63 IC5.1
LIGHT_INT: R1.1 U1.5 | length 109.1
  Top Layer w8: R1.1 467.94,145 476,136.94 500.31,136.94 505,141.63 505,155 510,160 510,168.6 523.94,182.54 U1.5
MIC_EN: Q1.1 R3.2 | length 527.7
  Top Layer w8: Q1.1 30.32,271.89 35.76,277.34 39.01,277.34 67.92,306.25 111.64,306.25 153.32,264.57 153.32,226.68 195,185 195,160.22 290,65.22 v2(290,0) ; Q1.1@35.31,260.39 35.31,231.69 R3.2@47,220 ; R3.2 R3.2@49.5,222.5
MIC_ENV: C4.1 D1.1 R7.1 R9.1 | length 689.9
  Top Layer w8: v1(200,400) 198.44,401.56 186.44,401.56 R9.1 155,450 175,470 175,519.54 D1.1 163.94,533.94 169.98,533.94 171.48,532.44 178.11,532.44 182.8,537.12 182.8,537.84 188.65,543.7 190.59,543.7 196.8,549.91 196.8,550.3 204.61,558.11 C4.1 225.11,558.11 R7.1@242,575
  PWR w10: v2(140,45) 140,93.36 135.21,98.15 135.21,132.04 157.69,154.51 157.69,189.31 145,202 145,346.14 178.52,379.66 179.66,379.66 v1(200,400)
MIC_SIG: C2.1 IC2.1 R5.1 | length 396.5
  Bottom Layer w8: C2.1@25,318 C2.1@27,320 ; C2.1 20.17,318.17 20.17,315.07 11.56,306.46 11.56,283.44 35,260 v2(35,160) ; C2.1@35,318 35,403.28 73.74,442.02 R5.1 75,450 98.28,450 99.55,448.74 107.27,448.74 111.11,452.58 119.4,452.58 120.45,451.53 123.1,451.53 125.09,449.54 127.78,449.54 IC2.1
NetC2_2: C2.2 IC2.5 R4.2 | length 157.6
  Bottom Layer w8: R4.2@70,288 73,291 73,310 ; C2.2 73,310 ; IC2.5 111.9,350.14 111.9,347.45 130.46,328.89 130.46,312.54 ; 131.2,314.63 122.81,306.25 96.54,306.25 94.61,308.17 84.83,308.17 78,315 73,310
NetC3_1: C3.1 MK1.2 | length 89.8
  Bottom Layer w8: C3.1 211.26,503.74 223.43,491.57 245.41,491.57 247.01,489.97 262.59,489.97 274.02,478.54 283.54,478.54 MK1.2@285,480
NetC3_2: C3.2 R6.2 | length 42.4
  Bottom Layer w8: R6.2 C3.2
NetC7_2: C7.2 IC4.5 R12.1 | length 244.5
  PWR w10: v1(215.54,203.41) 215.54,237.81 220,242.27 205,257.27 266.27,318.54 v1(268.24,318.54)
  Bottom Layer w8: C7.2 215.54,202.54 v1(215.54,203.41) ; v1@266.88,319.15 266.88,333.88 R12.1 ; v1(268.24,318.54) 270.54,316.24 270.54,311.51 275.22,306.82 275.22,301.28 277.13,299.37 IC4.5
NetD1_2: D1.2 IC2.7 | length 258.3
  Top Layer w8: v1(72.73,352.64) 70.43,354.93 66.21,354.93 66.14,355 40,355 30,365 30,408.8 45,423.8 45,440 85,480 103.96,480 111.69,487.73 D1.2
  Bottom Layer w8: v1(72.73,352.64) 75.02,354.93 75.02,366.25 88.81,380.03 IC2.7
NetIC2_2: IC2.2 R5.2 R6.1 | length 115.8
  Bottom Layer w8: R5.2 139.28,481.26 139.59,480.95 147.88,480.95 148.19,481.26 160.27,481.26 171.35,470.18 176.26,470.18 IC2.2
NetIC2_3: IC2.3 R8.2 R10.1 | length 169
  Bottom Layer w8: IC2.3 200.18,466.26 R10.1 249.73,466.26 262.63,453.37 R8.2@308.71,453.37
NetIC2_6: IC2.6 R9.2 R11.1 | length 231.2
  Top Layer w8: R9.2 81.72,450 59,427.28 59,418 55.14,414.14 55.14,398.14 R11.1 74.36,372.64 85.11,372.64 104.82,352.93 v1(104.82,326.25)
  Bottom Layer w8: IC2.6@100,365 100,366.08 IC2.6 102.73,366.11 95.17,358.56 95.17,355.91 92.73,353.46 92.73,345.18 102.53,335.38 102.53,328.54 v1(104.82,326.25)
NetIC4_7: IC4.7 IC5.3 R14.1 | length 210
  Bottom Layer w8: IC4.7 323,260 R14.1 348,285 386.56,285 cw(c405.2,257.2) 423.83,285 425.86,285 452.08,258.78 455.53,258.78 457.41,256.91 468.09,256.91 IC5.3
NetIC5_2: IC5.2 R17.2 R18.2 | length 94.6
  Bottom Layer w8: R18.2@390,203 425,203 431.83,209.83 431.83,211.83 455,235 469.69,235 IC5.2
NetIC5_6: IC5.6 IC5.7 R16.1 | length 168.7
  Bottom Layer w8: 510,140 510.87,140 519.44,148.56 580,209.13 580,230 574.68,235.31 IC5.7 IC5.6
TP_INT: IC1.4 R2.1 U2.8 | length 206.6
  Top Layer w8: IC1.4 340.81,407.44 299.18,365.82 299.18,340.83 U2.8@351.23,288.78
  Bottom Layer w8: R2.1 332,385.95 342.95,396.91 IC1.4
TRANS_IMP_OUT: C7.1 C8.1 IC4.1 IC5.5 R13.2 | length 712.3
  PWR w10: v1(183.14,229.01) 183.14,216.46 178.69,212.01 175,215.7 175,255 285,365 365,365 398.19,331.81 414.94,331.81 416.43,330.32 429.68,330.32 v1(445,315)
  Bottom Layer w8: R13.2 C8.1 ; C7.1@162,201.83 162,198 C7.1 165,198 165,201.83 C8.1 ; C8.1@173.07,218.93 v1(183.14,229.01) ; IC4.1 200.42,238.41 192.54,238.41 v1(183.14,229.01) ; v1(445,315) 445,318.25 450.71,323.96 450.71,324.4 466.31,340 468.28,340 478.28,350 520,350 552.68,317.32 IC5.5 ; C8.1 167.01,229.01 v1(183.14,229.01)
pads on no net: U1.4
copper on no net:
  other v3: 250.72,542.96

## Polygon pours and split planes (outlines as drawn)
3.3V_MIC on PWR "Top Layer-GND 1" (solid, remove dead copper, pour order 10): 85,100 85.48,100.52 431.99,447.02 438.87,453.91 439.52,454.5 299.57,594.44 ccw(c299.57,300.66)
3.3V on PWR "Top Layer-GND 1" (solid, remove dead copper, pour order 9): 100,85 454.3,439.3 594.44,299.57 cw(c300.66,299.57)
GND on GND "Top Layer-GND 1" (solid, remove dead copper, pour order 1): 595,300 cw(c301.22,300) 301.22,593.78

## Silkscreen, mask and mechanical layers (free items; w line width, h text height)
Top Overlay:
  text "ResEnv v1.1" at 220,60 h20
Bottom Overlay:
  text "CHWALEK / PROJ KOOSH" at 445,445 h20 r135
  text "v1_1" at 210.88,200 h20
Mechanical Board Shape:
  the board outline again, w3.94